# Altium PCB PCB_wordclocksmall_2023-02-03.pcbdoc (part 2 of 4)
Units mm, origin at the board's own origin, x right, y up, seen from the top; angles counter-clockwise.
Board outline 275.21 x 268.14 mm, 2 copper layers (Top Layer, Bottom Layer); 355 components, 229 nets, 1166 pads, 399 vias.
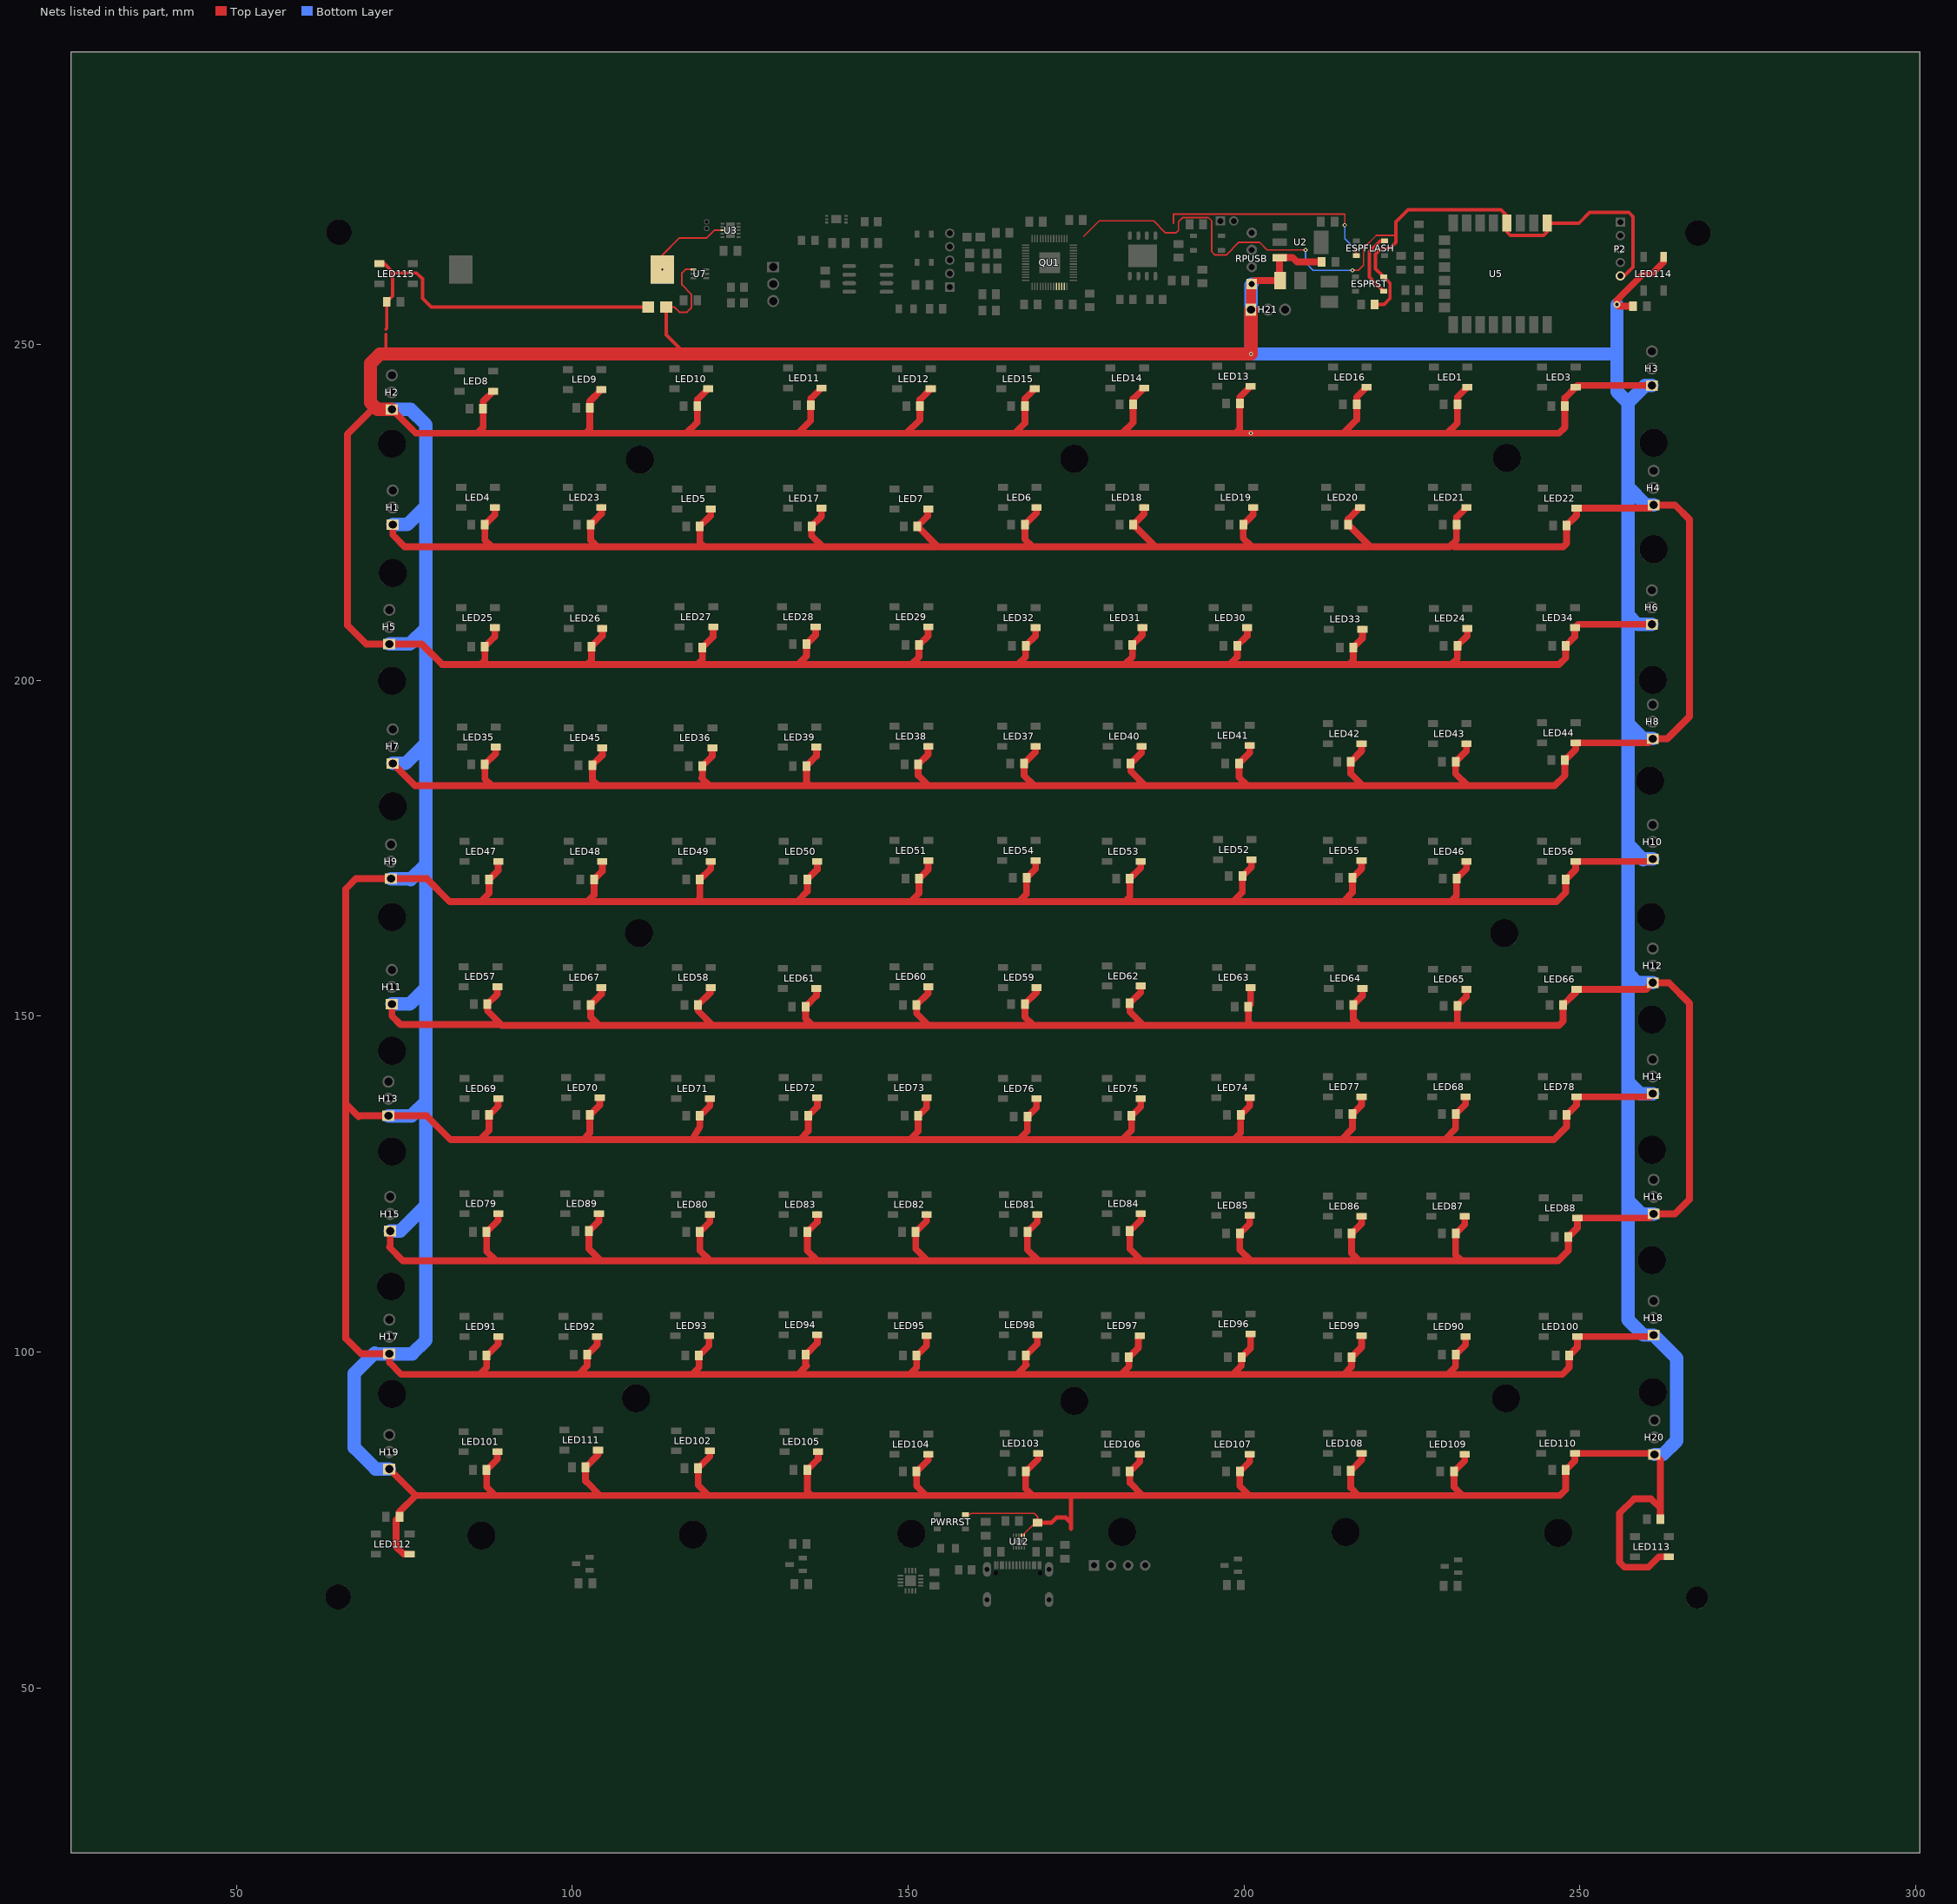
[diagram p2: the nets of this part, all layers, seen from the top]

## Via types
v1: diameter 0.635, hole 0.305, Top Layer to Bottom Layer, tented both sides, 361 vias
v2: diameter 0.61, hole 0.305, Top Layer to Bottom Layer, tented both sides, 37 vias
v3: diameter 1, hole 0.5, Top Layer to Bottom Layer, tented both sides, 1 vias

## Nets (pads, with @x,y where several pads share a name; then routed paths per layer and width w, separated by ;. In a path a pad name is that pad's centre, name@x,y a point inside that pad or via, vN(x,y) a via of type N, cw(c..) or ccw(c..) an arc to the next point about the centre after c; other vN are vias at no path point) (continued)
+5V: C1.1 C2.2 C5.1 C8.1 C11.1 C12.1 C13.1 C14.1 C15.1 C16.1 C17.1 C18.1 C19.1 C20.1 C21.1 C22.1 C23.1 C24.1 C25.1 C26.1 C27.1 C28.1 C29.1 C30.1 C31.1 C32.1 C33.1 C34.1 C35.1 C36.1 C37.1 C38.1 C39.1 C40.1 C41.1 C42.1 C43.1 C44.1 C45.1 C46.1 C47.1 C48.1 C49.1 C50.1 C51.1 C52.1 C53.1 C54.1 C55.1 C56.1 C57.1 C58.1 C59.1 C60.1 C61.1 C62.1 C63.1 C64.1 C65.1 C66.1 C67.1 C68.1 C69.1 C70.1 C71.1 C72.1 C73.1 C74.1 C75.1 C76.1 C77.1 C78.1 C79.1 C80.1 C81.1 C82.1 C83.1 C84.1 C85.1 C86.1 C87.1 C88.1 C89.1 C90.1 C91.1 C92.1 C93.1 C94.1 C95.1 C96.1 C97.1 C98.1 C99.1 C100.1 C101.1 C102.1 C103.1 C104.1 C105.1 C106.1 C107.1 C108.1 C109.1 C110.1 C111.1 C112.1 C113.1 C114.1 C115.1 C116.1 C117.1 C118.1 C119.1 C120.1 C121.1 C138.1 D1.2 H1.1 H2.1 H3.1 H4.1 H5.1 H6.1 H7.1 H8.1 H9.1 H10.1 H11.1 H12.1 H13.1 H14.1 H15.1 H16.1 H17.1 H18.1 H19.1 H20.1 H21.1 JP4.1 JP5.1 LED1.1 LED3.1 LED4.1 LED5.1 LED6.1 LED7.1 LED8.1 LED9.1 LED10.1 LED11.1 LED12.1 LED13.1 LED14.1 LED15.1 LED16.1 LED17.1 LED18.1 LED19.1 LED20.1 LED21.1 LED22.1 LED23.1 LED24.1 LED25.1 LED26.1 LED27.1 LED28.1 LED29.1 LED30.1 LED31.1 LED32.1 LED33.1 LED34.1 LED35.1 LED36.1 LED37.1 LED38.1 LED39.1 LED40.1 LED41.1 LED42.1 LED43.1 LED44.1 LED45.1 LED46.1 LED47.1 LED48.1 LED49.1 LED50.1 LED51.1 LED52.1 LED53.1 LED54.1 LED55.1 LED56.1 LED57.1 LED58.1 LED59.1 LED60.1 LED61.1 LED62.1 LED63.1 LED64.1 LED65.1 LED66.1 LED67.1 LED68.1 LED69.1 LED70.1 LED71.1 LED72.1 LED73.1 LED74.1 LED75.1 LED76.1 LED77.1 LED78.1 LED79.1 LED80.1 LED81.1 LED82.1 LED83.1 LED84.1 LED85.1 LED86.1 LED87.1 LED88.1 LED89.1 LED90.1 LED91.1 LED92.1 LED93.1 LED94.1 LED95.1 LED96.1 LED97.1 LED98.1 LED99.1 LED100.1 LED101.1 LED102.1 LED103.1 LED104.1 LED105.1 LED106.1 LED107.1 LED108.1 LED109.1 LED110.1 LED111.1 LED112.1 LED113.1 LED114.1 PWRRST.2 RPUSB.1 U2.3 U7.1 U12.1 U12.2 | length 3661.7
  Top Layer w0.229: PWRRST.2@158.564,75.796 159.19,75.796 159.385,75.991 168.783,75.991 169.291,75.483 C138.1@169.291,74.594 168.91,74.594 167.297,72.981 U12.1@167.297,72.727
  Top Layer w0.254: D1.2@113.993,255.569 115.189,255.569 115.951,254.807 117.094,254.807 117.729,255.442 117.729,257.474 116.332,258.871 116.332,260.649 116.855,261.172 U7.1@118.054,261.172 ; U12.2@166.897,72.728 U12.1@167.297,72.727 U12.2@166.897,72.728
  Top Layer w0.508: 72.263,248.584 JP4.1@72.263,251.48 ; D1.2@113.991,255.569 113.991,251.432 116.839,248.584
  Top Layer w0.635: C138.1@169.291,74.594 171.323,74.594 172.085,75.356 173.482,75.356 174.244,74.594 174.244,73.73 JP5.1@174.269,73.705 174.269,78.658
  Top Layer w1: H13.1@72.644,135.173 78.359,135.173 81.915,131.617 86.233,131.617 ; H19.1@72.771,82.595 76.708,78.658 ; H17.1@72.771,99.74 72.771,98.47 74.549,96.692 86.233,96.692 ; H5.1@72.771,205.404 77.597,205.404 80.645,202.356 86.36,202.356 ; H15.1@72.898,118.028 72.898,115.742 72.771,115.615 74.803,113.583 88.646,113.583 ; H9.1@73.025,170.479 78.359,170.479 81.788,167.05 86.36,167.05 ; H11.1@73.152,151.81 73.152,150.032 74.422,148.762 89.408,148.762 ; H2.1@73.152,240.329 76.708,236.773 85.852,236.773 ; H7.1@73.279,187.624 76.581,184.322 88.011,184.322 ; H1.1@73.279,223.184 73.279,221.66 75.057,219.882 88.011,219.882 ; LED112.1@75.779,69.919 74.906,69.919 73.787,71.038 73.787,74.975 C119.1@74.295,75.483 74.295,76.245 76.708,78.658 ; LED8.1@88.225,243.02 86.741,241.536 C16.1@86.741,240.456 86.741,237.662 85.852,236.773 ; LED25.1@88.479,207.841 88.479,206.507 C32.1@86.995,205.023 86.995,202.991 86.36,202.356 ; LED4.1@88.479,225.748 88.479,224.668 C12.1@86.995,223.184 86.995,220.898 88.011,219.882 ; LED35.1@88.606,190.061 88.606,189.108 C42.1@86.995,187.497 86.995,185.338 88.011,184.322 ; LED101.1@88.86,85.159 88.86,84.079 C108.1@87.249,82.468 87.249,79.928 88.519,78.658 ; LED57.1@88.86,154.374 88.86,153.294 C64.1@87.376,151.81 87.376,150.794 89.535,148.635 104.013,148.635 ; LED91.1@88.987,102.304 88.987,101.224 C98.1@87.249,99.486 87.249,97.708 86.233,96.692 ; LED79.1@88.987,120.592 88.987,119.639 C86.1@87.249,117.901 87.249,114.98 88.646,113.583 ; LED69.1@88.987,137.737 88.987,136.657 C76.1@87.63,135.3 87.63,133.014 87.376,132.76 86.233,131.617 ; LED47.1@88.987,173.043 88.987,171.709 C54.1@87.63,170.352 87.63,168.32 86.36,167.05 ; LED92.1@103.719,102.304 103.719,101.097 C99.1@102.235,99.613 102.235,97.962 100.965,96.692 ; LED111.1@103.846,85.413 103.846,84.714 C118.1@101.981,82.849 101.981,80.817 102.108,80.69 104.14,78.658 ; LED89.1@103.973,120.592 103.973,119.512 C96.1@102.489,118.028 102.489,115.361 104.267,113.583 ; LED70.1@104.1,137.864 104.1,136.784 C77.1@102.616,135.3 102.616,132.633 101.6,131.617 ; LED67.1@104.354,154.247 104.354,153.294 C74.1@102.743,151.683 102.743,149.905 104.013,148.635 ; LED23.1@104.354,225.748 104.354,224.795 C30.1@102.743,223.184 102.743,220.898 103.759,219.882 ; LED9.1@104.354,243.274 102.616,241.536 C17.1@102.616,240.583 102.616,237.408 101.981,236.773 ; LED48.1@104.481,173.043 104.481,171.582 C55.1@103.251,170.352 103.251,168.066 102.235,167.05 ; LED45.1@104.481,189.934 104.481,188.854 C52.1@102.997,187.37 102.997,185.211 103.886,184.322 ; LED26.1@104.481,207.714 104.481,206.634 C33.1@102.87,205.023 102.87,202.991 102.235,202.356 ; LED10.1@120.229,243.401 118.618,241.79 C18.1@118.618,240.837 118.618,238.424 116.967,236.773 ; LED93.1@120.356,102.431 120.356,100.97 C100.1@118.872,99.486 118.872,97.708 117.856,96.692 ; LED102.1@120.483,85.286 120.483,84.46 C109.1@118.745,82.722 118.745,80.182 120.269,78.658 ; LED80.1@120.483,120.465 120.483,119.385 C87.1@118.999,117.901 118.999,115.107 120.523,113.583 ; LED71.1@120.483,137.737 120.483,136.657 C78.1@118.999,135.173 118.999,133.522 117.856,131.617 ; LED58.1@120.61,154.247 120.61,153.548 C65.1@118.745,151.683 118.745,150.794 120.904,148.635 135.89,148.635 ; LED49.1@120.61,173.043 120.61,171.963 C56.1@118.999,170.352 118.999,167.558 118.491,167.05 ; LED5.1@120.61,225.494 120.61,224.541 C13.1@118.999,222.93 118.999,220.517 119.634,219.882 ; LED36.1@120.864,189.934 120.864,188.727 C43.1@119.38,187.243 119.38,185.592 119.253,185.465 120.396,184.322 ; LED27.1@120.991,207.968 120.991,206.507 C34.1@119.38,204.896 119.38,203.118 118.618,202.356 ; 121.158,148.635 104.013,148.635 ; LED28.1@136.231,207.968 136.231,206.761 C35.1@134.874,205.404 134.874,203.626 133.604,202.356 ; LED61.1@136.358,154.12 136.358,153.04 C66.1@134.747,151.429 134.747,149.651 135.763,148.635 153.035,148.635 ; LED39.1@136.358,190.061 136.358,188.727 C44.1@134.874,187.243 134.874,184.83 135.382,184.322 ; LED94.1@136.485,102.558 136.485,101.351 C101.1@134.747,99.613 134.747,98.089 134.874,97.962 133.604,96.692 ; LED83.1@136.485,120.465 136.485,119.385 C88.1@135.001,117.901 135.001,115.107 136.525,113.583 ; LED72.1@136.485,137.864 136.485,136.53 C79.1@135.128,135.173 135.128,132.887 133.858,131.617 ; LED50.1@136.485,173.043 136.485,171.836 C57.1@135.001,170.352 135.001,168.574 133.477,167.05 ; LED105.1@136.612,85.159 136.612,84.079 C110.1@135.001,82.468 135.001,79.293 135.636,78.658 ; LED17.1@137.12,225.621 137.12,224.414 C14.1@135.636,222.93 135.636,221.533 137.287,219.882 ; LED11.1@137.12,243.528 135.509,241.917 C19.1@135.509,240.964 135.509,238.678 133.604,236.773 ; LED95.1@152.741,102.431 152.741,100.97 C102.1@151.257,99.486 151.257,97.708 150.241,96.692 ; LED82.1@152.741,120.465 152.741,119.512 C89.1@151.13,117.901 151.13,115.361 152.908,113.583 ; LED73.1@152.741,137.864 152.741,136.403 C80.1@151.511,135.173 151.511,132.887 150.241,131.617 ; LED104.1@152.995,84.778 152.995,83.952 C111.1@151.257,82.214 151.257,80.055 152.654,78.658 ; LED60.1@152.995,154.374 152.995,153.421 C67.1@151.257,151.683 151.257,150.413 153.035,148.635 ; LED51.1@152.995,173.17 152.995,171.836 C58.1@151.638,170.479 151.638,168.32 151.511,168.193 150.368,167.05 ; LED38.1@152.995,190.188 152.995,188.981 C45.1@151.511,187.497 151.511,185.846 153.035,184.322 ; LED29.1@152.995,207.968 152.995,206.634 C36.1@151.638,205.277 151.638,203.499 150.495,202.356 ; LED7.1@152.995,225.494 152.995,225.049 152.908,224.962 152.908,224.454 C15.1@151.384,222.93 154.432,219.882 168.529,219.882 ; LED12.1@153.376,243.401 151.765,241.79 C20.1@151.765,240.837 151.765,238.805 149.733,236.773 ; 154.051,219.882 137.287,219.882 ; 168.783,148.635 153.035,148.635 ; LED15.1@168.87,243.401 167.386,241.917 C23.1@167.386,240.837 167.386,238.297 165.862,236.773 ; LED54.1@168.997,173.17 168.997,171.963 C59.1@167.64,170.606 167.64,168.193 166.497,167.05 ; LED37.1@168.997,190.188 168.997,189.362 C46.1@167.259,187.624 167.259,185.846 168.783,184.322 ; LED32.1@168.997,207.841 168.997,206.634 C37.1@167.513,205.15 167.513,203.499 166.37,202.356 ; LED76.1@169.124,137.737 169.124,136.403 C81.1@167.767,135.046 167.767,132.887 166.497,131.617 ; LED6.1@169.124,225.748 169.124,224.922 C24.1@167.386,223.184 167.386,221.025 168.529,219.882 ; LED59.1@169.124,154.247 169.124,153.548 C68.1@167.386,151.81 167.386,149.905 168.656,148.635 185.039,148.635 ; LED98.1@169.251,102.558 169.251,101.224 C103.1@167.513,99.486 167.513,98.216 167.64,98.089 166.243,96.692 ; LED81.1@169.251,120.465 169.251,119.385 C90.1@167.767,117.901 167.767,115.234 169.418,113.583 ; LED103.1@169.378,84.905 169.378,84.079 C112.1@167.513,82.214 167.513,79.674 168.529,78.658 ; LED106.1@184.491,84.778 184.491,83.698 C113.1@183.007,82.214 183.007,80.563 184.912,78.658 ; LED97.1@184.491,102.431 184.491,102.113 184.277,101.899 184.277,100.629 C104.1@182.88,99.232 182.88,97.835 181.737,96.692 ; LED84.1@184.618,120.592 184.618,119.639 C91.1@183.007,118.028 183.007,115.361 184.785,113.583 ; LED75.1@184.618,137.737 184.618,136.53 C82.1@183.261,135.173 183.261,133.014 181.864,131.617 ; LED62.1@184.618,154.501 184.618,153.548 C69.1@183.007,151.937 183.007,150.667 185.039,148.635 ; LED53.1@184.618,173.043 184.618,172.09 C60.1@183.007,170.479 183.007,167.812 182.245,167.05 ; LED40.1@184.745,190.188 184.745,189.235 C47.1@183.134,187.624 183.134,186.481 185.293,184.322 ; LED31.1@184.872,207.841 184.872,206.761 C38.1@183.388,205.277 183.388,203.499 182.245,202.356 ; LED18.1@185.126,225.748 185.126,224.795 C25.1@183.515,223.184 186.817,219.882 187.825,219.882 ; LED14.1@185.126,243.528 183.515,241.917 C22.1@183.515,241.091 183.515,238.424 181.864,236.773 ; LED30.1@200.493,207.841 200.493,206.634 C39.1@199.009,205.15 199.009,203.499 197.866,202.356 ; LED107.1@200.874,84.778 200.874,83.698 C114.1@199.39,82.214 199.39,80.055 200.787,78.658 ; LED85.1@200.874,120.338 200.874,119.131 C92.1@199.39,117.647 199.39,115.234 201.041,113.583 ; LED74.1@200.874,137.864 200.874,136.657 C83.1@199.517,135.3 199.517,132.633 198.501,131.617 ; LED41.1@200.874,190.315 200.874,189.235 C48.1@199.263,187.624 199.263,185.592 200.533,184.322 ; LED96.1@201.001,102.685 201.001,100.589 C105.1@199.644,99.232 199.644,97.962 198.374,96.692 ; LED13.1@201.001,243.782 199.39,242.171 C21.1@199.39,241.218 199.39,237.408 198.755,236.773 ; LED63.1@201.001,154.247 201.001,151.77 C70.1@200.66,151.429 200.66,149.143 201.168,148.635 ; LED52.1@201.128,173.297 201.128,172.217 C61.1@199.771,170.86 199.771,168.447 198.374,167.05 ; LED19.1@201.382,225.748 201.382,224.668 C26.1@199.898,223.184 199.898,221.152 201.168,219.882 ; 213.974,131.617 229.87,131.617 ; LED20.1@217.257,225.748 215.519,224.01 C27.1@215.519,223.184 218.821,219.882 230.632,219.882 231.648,220.898 C28.1@231.648,223.184 231.648,224.264 LED21.1@233.132,225.748 ; LED108.1@217.511,84.905 217.511,83.952 C115.1@215.9,82.341 215.9,79.801 217.043,78.658 ; LED99.1@217.511,102.431 217.511,100.716 C106.1@216.027,99.232 216.027,97.835 214.884,96.692 ; LED86.1@217.511,120.211 217.511,119.131 C93.1@216.027,117.647 216.027,114.726 217.17,113.583 ; LED77.1@217.511,137.991 217.511,136.784 C84.1@216.154,135.427 216.154,133.268 216.027,133.141 214.503,131.617 198.501,131.617 ; LED55.1@217.511,173.17 217.511,171.963 C62.1@216.154,170.606 216.154,168.447 214.757,167.05 ; LED42.1@217.511,190.569 217.511,189.489 C49.1@215.9,187.878 215.9,186.1 217.678,184.322 ; LED33.1@217.638,207.587 217.638,206.253 C40.1@216.281,204.896 216.281,202.991 215.646,202.356 ; LED64.1@217.638,154.12 217.638,153.04 C71.1@216.281,151.683 216.281,149.524 217.17,148.635 ; LED16.1@218.273,243.655 216.789,242.171 C5.1@216.789,241.091 216.789,238.805 214.757,236.773 ; 218.44,219.882 201.168,219.882 ; 231.013,220.263 231.394,219.882 247.523,219.882 248.031,220.39 C29.1@248.031,223.057 249.515,224.541 LED22.1@249.515,225.621 260.501,225.621 H4.1@260.985,226.105 ; LED109.1@232.878,84.778 232.878,83.825 C116.1@231.267,82.214 231.267,79.928 232.537,78.658 ; LED87.1@232.878,120.211 232.878,119.004 C94.1@231.521,117.647 231.521,114.472 232.41,113.583 ; LED90.1@233.005,102.304 233.005,101.097 C97.1@231.521,99.613 231.521,97.835 231.394,97.708 230.378,96.692 ; LED68.1@233.005,137.991 233.005,136.911 C75.1@231.521,135.427 231.521,133.268 229.87,131.617 ; LED46.1@233.132,173.043 233.132,171.963 C53.1@231.648,170.479 231.648,167.939 230.759,167.05 ; LED43.1@233.132,190.569 233.132,189.489 C50.1@231.521,187.878 231.521,186.1 233.299,184.322 ; LED65.1@233.132,153.993 233.132,152.913 C72.1@231.775,151.556 231.775,148.762 231.902,148.635 ; LED24.1@233.259,207.714 233.259,206.634 C31.1@231.775,205.15 231.775,203.245 230.886,202.356 ; LED1.1@233.259,243.655 231.775,242.171 C11.1@231.775,241.091 231.775,238.297 230.251,236.773 ; C121.1@257.937,255.696 255.778,255.696 v3(255.524,255.95) 255.524,256.585 256.667,257.728 259.461,260.522 260.731,260.522 262.485,262.276 LED114.1@262.485,263.022 ; H6.1@260.731,208.325 249.745,208.325 LED34.1@249.261,207.841 249.261,206.507 C41.1@247.904,205.15 247.904,203.372 246.888,202.356 230.886,202.356 ; H3.1@260.731,243.885 249.618,243.885 LED3.1@249.388,243.655 247.777,242.044 C1.1@247.777,240.837 247.777,237.662 246.888,236.773 230.251,236.773 ; H14.1@260.858,138.475 260.374,137.991 LED78.1@249.515,137.991 249.515,136.784 C85.1@248.031,135.3 248.031,133.522 246.126,131.617 229.87,131.617 ; H12.1@260.858,154.985 259.866,153.993 LED66.1@249.515,153.993 249.515,153.675 C73.1@247.523,151.683 247.523,149.27 246.888,148.635 231.902,148.635 ; H10.1@260.858,173.4 260.501,173.043 LED56.1@249.388,173.043 249.388,171.836 C63.1@247.904,170.352 247.904,168.447 246.507,167.05 230.759,167.05 ; H8.1@260.858,191.307 260.247,190.696 LED44.1@249.388,190.696 249.388,189.743 C51.1@247.777,188.132 247.777,185.846 246.253,184.322 233.299,184.322 ; H18.1@260.985,102.534 260.755,102.304 LED100.1@249.642,102.304 249.642,100.716 C107.1@248.412,99.486 248.412,97.708 247.396,96.692 230.378,96.692 ; H16.1@260.985,120.568 260.374,119.957 LED88.1@249.642,119.957 249.642,118.496 C95.1@248.285,117.139 248.285,115.107 246.761,113.583 232.41,113.583 ; LED113.1@263.23,69.539 261.772,69.539 260.223,67.99 256.667,67.99 255.905,68.752 255.905,75.991 258.064,78.15 260.604,78.15 262.001,76.753 C120.1@262.001,75.102 262.001,83.865 H20.1@261.112,84.754 260.961,84.905 LED110.1@249.261,84.905 249.261,83.825 C117.1@247.904,82.468 247.904,79.547 247.015,78.658 232.537,78.658 ; 76.708,78.658 88.519,78.658 ; 85.852,236.773 101.981,236.773 ; 86.233,96.692 100.965,96.692 ; 86.233,131.617 101.6,131.617 ; 86.36,167.05 102.235,167.05 ; 86.36,202.356 102.235,202.356 ; 88.011,184.322 103.886,184.322 ; 88.011,219.882 103.759,219.882 ; 88.519,78.658 104.14,78.658 ; 88.646,113.583 104.267,113.583 ; 100.965,96.692 117.856,96.692 ; 101.6,131.617 117.856,131.617 ; 101.981,236.773 116.967,236.773 ; 102.235,167.05 118.491,167.05 ; 102.235,202.356 118.618,202.356 ; 103.759,219.882 119.634,219.882 ; 103.886,184.322 120.396,184.322 ; 104.14,78.658 120.269,78.658 ; 104.267,113.583 120.523,113.583 ; 116.967,236.773 133.604,236.773 ; 117.856,96.692 133.604,96.692 ; 117.856,131.617 133.858,131.617 ; 118.491,167.05 133.477,167.05 ; 118.618,202.356 133.604,202.356 ; 119.634,219.882 137.287,219.882 ; 120.269,78.658 135.636,78.658 ; 120.396,184.322 135.382,184.322 ; 120.523,113.583 136.525,113.583 ; 133.477,167.05 150.368,167.05 ; 133.604,96.692 150.241,96.692 ; 133.604,202.356 150.495,202.356 ; 133.604,236.773 149.733,236.773 ; 133.858,131.617 150.241,131.617 ; 135.382,184.322 153.035,184.322 ; 135.636,78.658 152.654,78.658 ; 136.525,113.583 152.908,113.583 ; 149.733,236.773 165.862,236.773 ; 150.241,96.692 166.243,96.692 ; 150.241,131.617 166.497,131.617 ; 150.368,167.05 166.497,167.05 ; 150.495,202.356 166.37,202.356 ; 152.654,78.658 168.529,78.658 ; 152.908,113.583 169.418,113.583 ; 153.035,184.322 168.783,184.322 ; 165.862,236.773 181.864,236.773 ; 166.243,96.692 181.737,96.692 ; 166.37,202.356 182.245,202.356 ; 166.497,131.617 181.864,131.617 ; 166.497,167.05 182.245,167.05 ; 168.529,78.658 184.912,78.658 ; 168.529,219.882 187.825,219.882 ; 168.783,184.322 185.293,184.322 ; 169.418,113.583 184.785,113.583 ; 181.737,96.692 198.374,96.692 ; 181.864,131.617 198.501,131.617 ; 181.864,236.773 198.755,236.773 ; 182.245,167.05 198.374,167.05 ; 182.245,202.356 197.866,202.356 ; 184.785,113.583 201.041,113.583 ; 184.912,78.658 200.787,78.658 ; 185.039,148.635 201.168,148.635 ; 185.293,184.322 200.533,184.322 ; 187.825,219.882 201.168,219.882 ; 197.866,202.356 215.646,202.356 ; 198.374,96.692 214.884,96.692 ; 198.374,167.05 214.757,167.05 ; 198.755,236.773 v2(201.016,236.773) 214.757,236.773 ; 200.533,184.322 217.678,184.322 ; 200.787,78.658 217.043,78.658 ; 201.041,113.583 217.17,113.583 ; 201.168,148.635 217.17,148.635 ; 214.757,167.05 230.759,167.05 ; 214.757,236.773 230.251,236.773 ; 214.884,96.692 230.378,96.692 ; 215.646,202.356 230.886,202.356 ; 217.043,78.658 232.537,78.658 ; 217.17,113.583 232.41,113.583 ; 217.17,148.635 231.902,148.635 ; 217.678,184.322 233.299,184.322
  Top Layer w1.016: H13.1@72.644,135.173 68.326,135.173 68.199,135.046 66.294,136.951 ; H17.1@72.771,99.74 68.58,99.74 66.294,102.026 66.294,136.951 ; H5.1@72.771,205.404 69.342,205.404 66.548,208.198 66.548,236.646 70.231,240.329 H2.1@73.152,240.329 ; H9.1@73.025,170.479 67.818,170.479 66.294,168.955 66.294,136.951 ; RPUSB.1@201.168,258.998 201.676,259.506 C8.1@205.382,259.506 205.308,259.58 U2.3@205.308,262.922 207.251,262.922 207.899,262.3 C2.2@211.582,262.3 ; H12.1@260.858,154.985 263.271,154.985 266.319,151.937 266.319,122.727 264.16,120.568 H16.1@260.985,120.568 ; H8.1@260.858,191.307 263.017,191.307 266.319,194.609 266.319,223.946 264.16,226.105 H4.1@260.985,226.105
  Top Layer w1.524: H21.1@201.041,255.188 201.041,258.871 RPUSB.1@201.168,258.998
  Top Layer w1.981: H2.1@73.152,240.329 71,240.329 69.977,241.352 69.977,247.187 71.374,248.584 82.804,248.584 189.352,248.584 v2(201.041,248.584) H21.1@201.041,255.188
  Bottom Layer w1.981: RPUSB.1@201.168,258.998 201.041,258.871 H21.1@201.041,255.188 v2(201.041,248.584) 255.524,248.584
  Bottom Layer w2: H13.1@72.644,135.173 76.073,135.173 78.232,137.332 ; H19.1@72.771,82.595 70.739,82.595 67.564,85.77 67.564,96.819 70.612,99.867 70.739,99.74 H17.1@72.771,99.74 76.2,99.74 78.232,101.772 78.232,121.838 ; H5.1@72.771,205.404 75.819,205.404 78.232,207.817 ; H15.1@72.898,118.028 74.422,118.028 78.232,121.838 ; H9.1@73.025,170.479 75.819,170.479 75.946,170.352 78.232,172.638 ; H11.1@73.152,151.81 75.819,151.81 78.232,154.223 ; H2.1@73.152,240.329 75.946,240.329 78.232,238.043 78.232,225.978 ; H7.1@73.279,187.624 75.184,187.624 78.232,190.672 78.232,207.817 ; H1.1@73.279,223.184 75.438,223.184 78.232,225.978 ; 78.232,192.577 78.232,172.638 ; v3(255.524,255.95) 255.524,242.996 257.175,241.345 ; H6.1@260.731,208.325 258.572,208.325 257.175,209.722 ; H3.1@260.731,243.885 259.715,243.885 257.175,241.345 ; H14.1@260.858,138.475 258.953,138.475 257.175,140.253 ; H12.1@260.858,154.985 258.826,154.985 258.699,154.858 257.175,156.382 ; H10.1@260.858,173.4 259.588,173.4 259.461,173.273 257.175,175.559 ; H8.1@260.858,191.307 259.461,191.307 257.175,193.593 ; H16.1@260.985,120.568 259.207,120.568 257.175,122.6 ; H4.1@260.985,226.105 259.842,226.105 257.175,228.772 ; H20.1@261.112,84.754 262.382,84.754 264.414,86.786 264.414,99.105 H18.1@260.985,102.534 259.461,102.534 257.175,104.82 257.175,122.6 ; 78.232,121.838 78.232,137.332 ; 78.232,137.332 78.232,154.223 ; 78.232,154.223 78.232,172.638 ; 78.232,207.817 78.232,225.978 ; 257.175,122.6 257.175,140.253 ; 257.175,140.253 257.175,156.382 ; 257.175,156.382 257.175,175.559 ; 257.175,175.559 257.175,193.593 ; 257.175,193.593 257.175,209.722 ; 257.175,209.722 257.175,228.772 ; 257.175,228.772 257.175,241.345
ADC0: QU1.38
ADC1: QU1.39
ADC2: QU1.40
ADC3: QU1.41
BT1_1: BT1.1 BT2.1 U3.3 | length 12.6
  Top Layer w0.254: v2(113.413,261.157) 113.413,263.318 115.951,265.856 120.015,265.856 121.158,266.999 U3.3@122.354,266.999
D1_1: C122.1 D1.1 JP4.2 LED115.1 | length 55.1
  Top Layer w0.508: LED115.1@71.287,262.022 LED115.1@72.033,262.022 ; JP4.2@72.263,252.292 72.39,252.419 C122.1@72.39,256.331 73.279,257.22 73.279,260.776 LED115.1@72.033,262.022 ; D1.1@111.306,255.569 78.994,255.569 77.724,256.839 77.724,259.76 76.835,260.649 73.406,260.649 LED115.1@72.033,262.022
ESPFLASH_3: ESPFLASH.3 JP15.1 | length 33.8
  Top Layer w0.229: JP15.1@189.509,268.015 189.509,269.412 215.011,269.412 v1(215.011,267.761) ; v1(216.662,264.205) 216.721,264.146 ESPFLASH.3@216.721,263.257
  Bottom Layer w0.229: v1(215.011,267.761) 215.011,265.729 216.535,264.205 v1(216.662,264.205)
ESPRST_1: ESPFLASH.2 ESPRST.1 | length 9.7
  Top Layer w0.508: ESPRST.1@220.794,257.923 218.694,260.024 218.694,263.824 220.276,265.406 ESPFLASH.2@220.921,265.407
ESPRST_3: ESPRST.3 JP14.1 P2.5 R6.1 U5.1 U5.4 | length 130.5
  Top Layer w0.229: JP14.1@176.174,266.11 178.46,268.396 186.563,268.396 188.341,266.618 189.865,266.618 190.246,266.999 190.246,268.269 190.881,268.904 194.691,268.904 195.199,268.396 195.199,263.824 195.707,263.316 197.358,263.316 199.263,265.221 202.311,265.221 203.454,264.078 v1(209.169,264.078) ; v1(216.154,261.03) 217.043,261.03 217.805,261.792 217.805,264.332 219.71,266.237 222.631,266.237
  Top Layer w0.508: R6.1@219.456,255.95 220.853,255.95 221.742,256.839 221.742,259.125 ESPRST.3@220.794,260.073 219.583,261.284 219.583,263.443 220.472,264.332 221.742,264.332 222.631,265.221 222.631,268.269 224.409,270.047 238.252,270.047 239.141,269.158 U5.4@239.141,268.073 239.141,266.745 239.649,266.237 244.602,266.237 245.14,266.775 U5.1@245.141,268.073 249.867,268.073 251.46,269.666 257.302,269.666 257.937,269.031 257.937,261.538 256.603,260.204 P2.5@256.032,260.205
  Bottom Layer w0.229: v1(209.169,264.078) 209.169,262.173 210.312,261.03 v1(216.154,261.03)